# Altium PCB OLED.PcbDoc
Units mm, origin at the board's own origin, x right, y up, seen from the top; angles counter-clockwise.
Board outline 80.01 x 69.34 mm, 2 copper layers (Top Layer, Bottom Layer); 20 components, 10 nets, 62 pads, 4 vias.
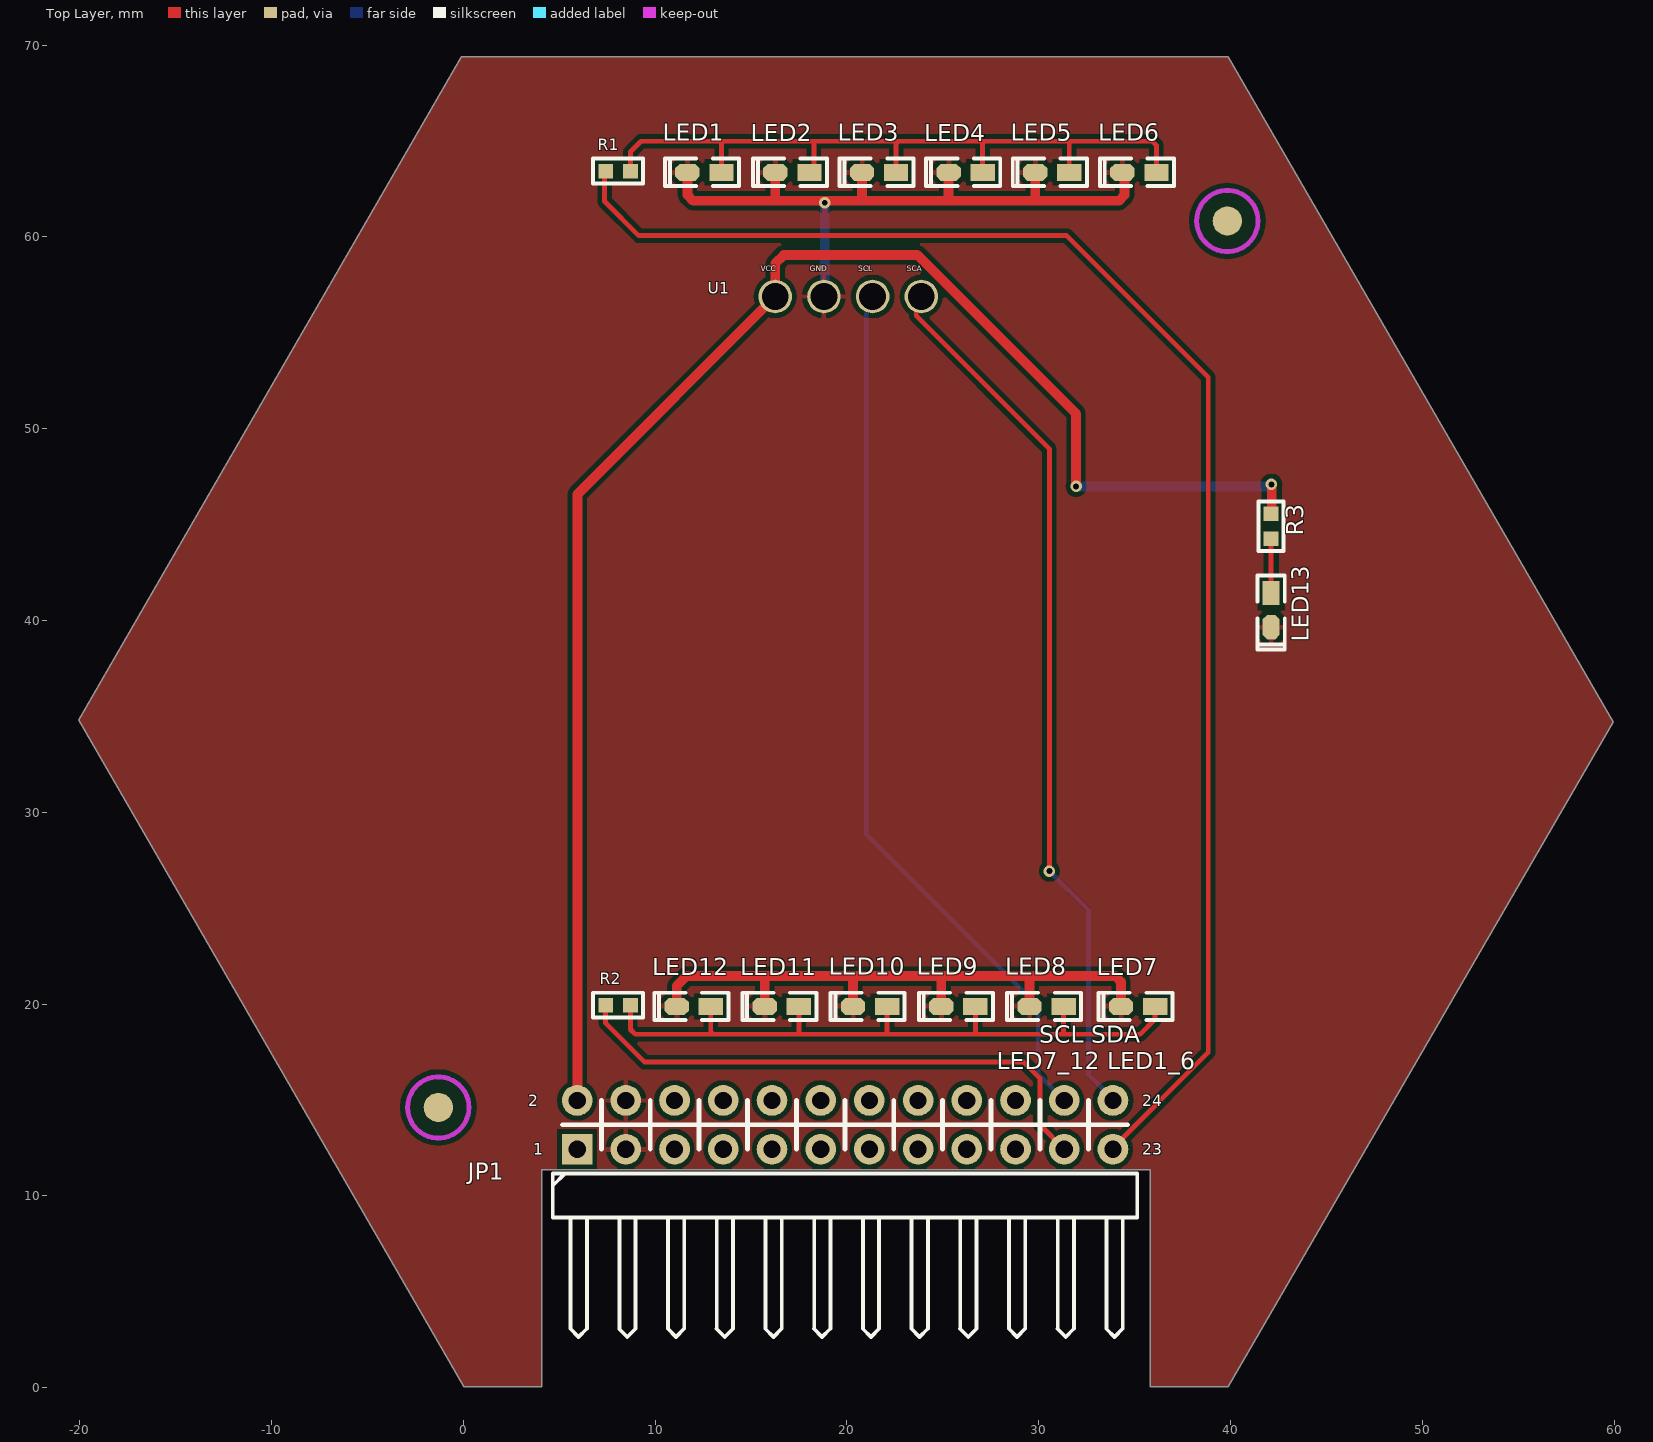
[diagram p0: Top Layer view]
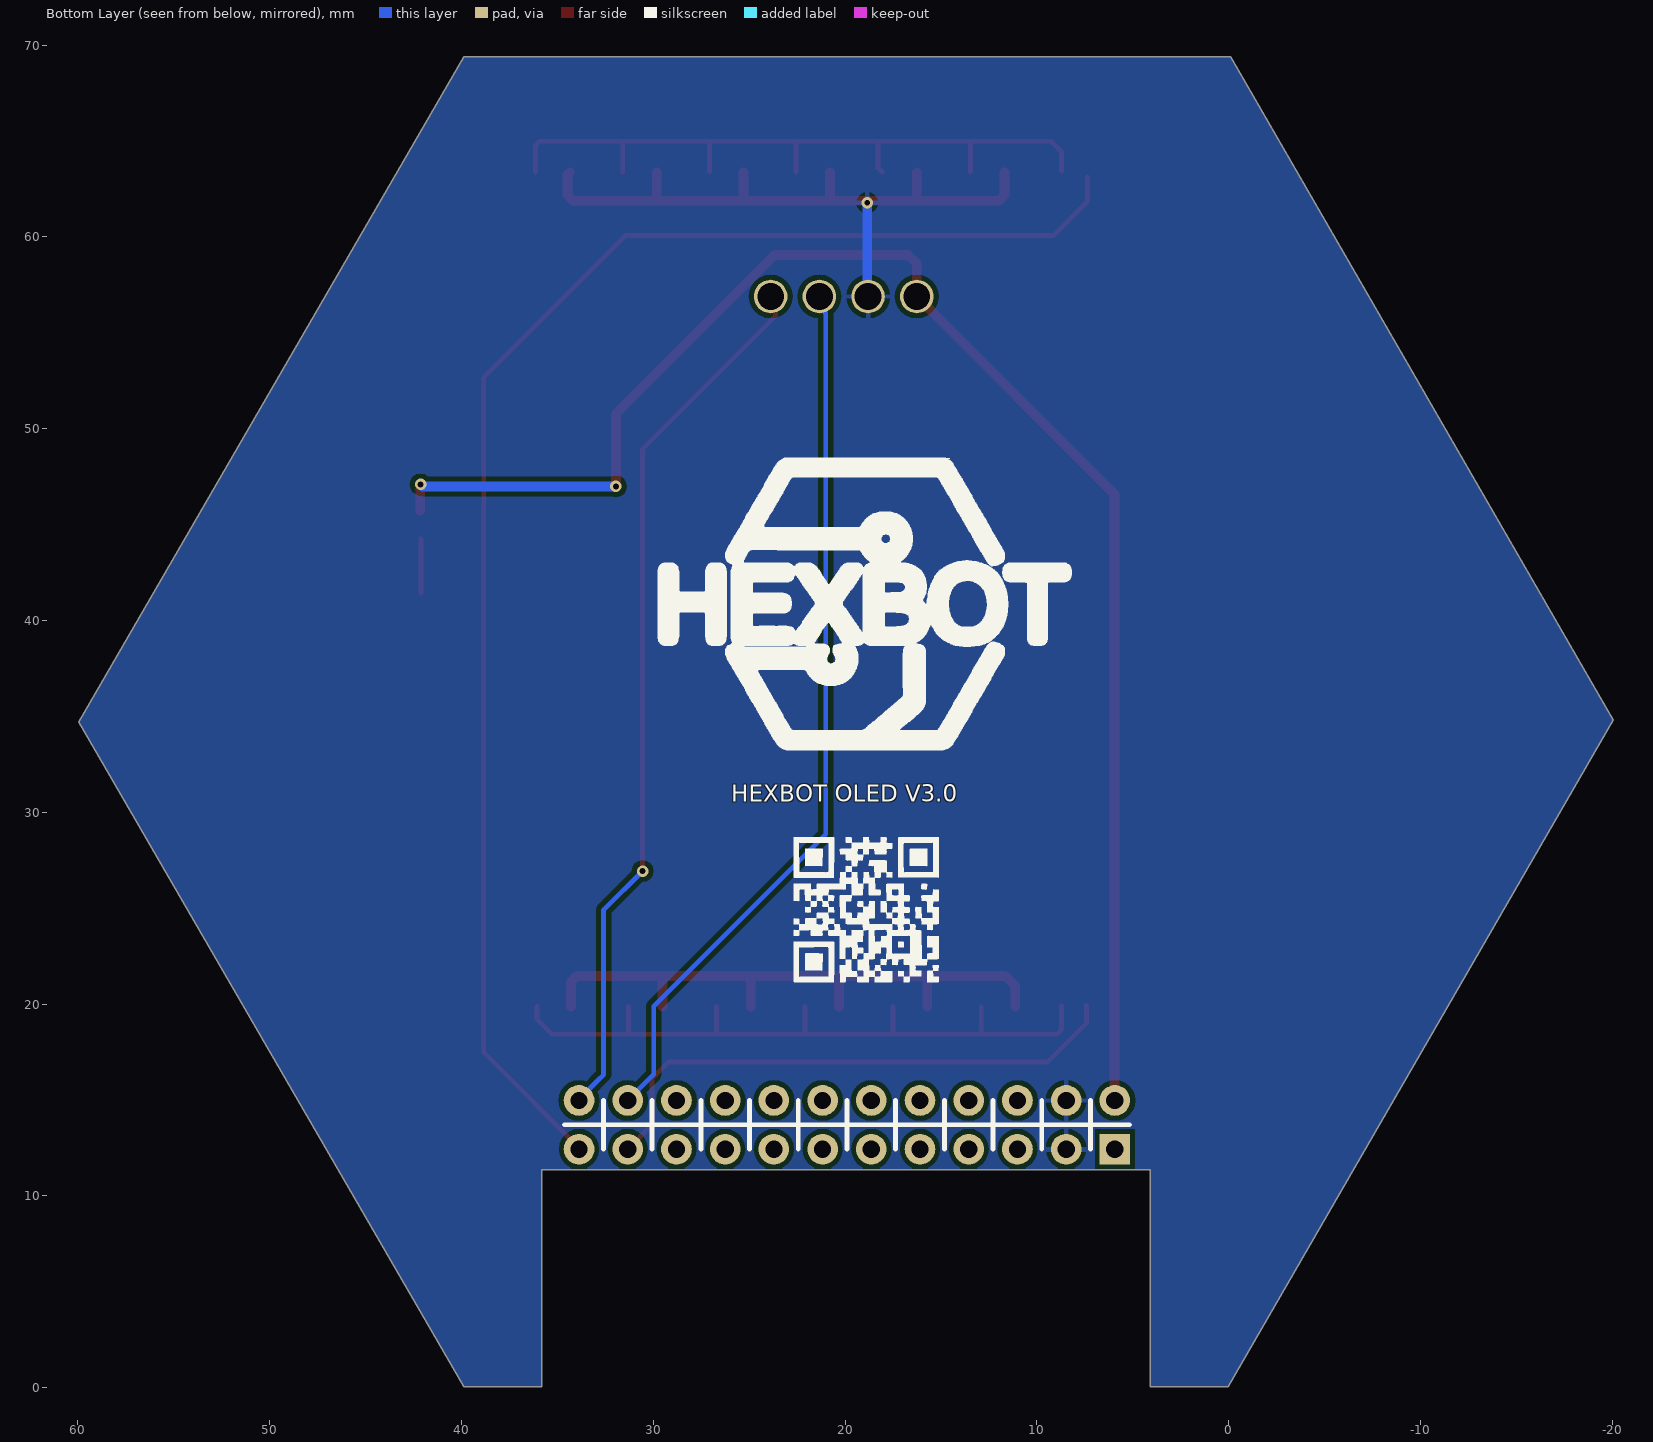
[diagram p1: Bottom Layer view, seen from below]

## Layer stack, top to bottom
Top Solder: solder mask 0.0102, Solder Resist, Dk 3.5
Top Layer: signal copper 0.0356
Dielectric 1: dielectric 0.32, FR-4, Dk 4.8
Bottom Layer: signal copper 0.0356
Bottom Solder: solder mask 0.0102, Solder Resist, Dk 3.5

## Board outline
0.011,0.054 -20.059,34.818 -0.108,69.396 39.889,69.396 59.955,34.715 39.889,0.054 35.825,0.054 35.825,11.348 4.075,11.348 4.075,0.054

## Design rules (kind name [scope] priority, off if disabled: settings)
Clearance [All] p1: gap=0.254 ignorepadtopadclearanceinfootprint=FALSE except(0: Arc-Hole Track-Hole SMDPad-Hole THPad-Hole Via-Hole Fill-Hole Poly-Hole Region-Hole Text-Hole)
ComponentClearance [All] p1: gap=0 collisioncheckmode=3 verticalgap=0.254 showdistances=FALSE
MinimumSolderMaskSliver [All] p1: minsoldermaskwidth=0
PolygonConnect [All] p1: connectstyle=Relief reliefconductorwidth=0.254 reliefentries=4 polygonreliefangle="90 Angle" airgapwidth=0.254
RoutingVias [All] p1: holewidth=0.711 width=1.27 viastyle="Through Hole" minholewidth=0.711 minwidth=1.27 maxholewidth=0.711 maxwidth=1.27
SilkToSilkClearance [All] p1: silktosilkclearance=0
SilkToSolderMaskClearance [IsPad] p1: minsilkscreentomaskgap=0 clearancetoexposedcopper=TRUE
SolderMaskExpansion [All] p1: expansion=0.102 istentingtop=FALSE
Width VCC/GND [InNetClass('New Class')] p1: maxlimit=0.508 minlimit=0.508 preferedwidth=0.508
Width [All] p2: maxlimit=0.508 minlimit=0.254 preferedwidth=0.254
26 further rules are at their usual default settings.

## Classes and differential pairs
component class OLED: JP1 LED1 LED2 LED3 LED4 LED5 LED6 LED7 LED8 LED9 LED10 LED11 LED12 LED13 R1 R2 R3 U1

## Components (designator, comment, footprint, x,y, rotation, side; value= is the part's Value field where it differs from the comment)
JP1 "Header 2X11" HDR2.54-WI-2x12P 19.899,13.703 r0 top
LED1 "红色" "LED 0603R" 12.568,63.378 r180 top
LED2 "红色" "LED 0603R" 17.154,63.378 r180 top
LED3 "红色" "LED 0603R" 21.67,63.378 r180 top
LED4 "红色" "LED 0603R" 26.187,63.378 r180 top
LED5 "红色" "LED 0603R" 30.703,63.378 r180 top
LED6 "红色" "LED 0603R" 35.247,63.378 r180 top
LED7 "红色" "LED 0603R" 35.176,19.884 r180 top
LED8 "红色" "LED 0603R" 30.407,19.884 r180 top
LED9 "红色" "LED 0603R" 25.805,19.884 r180 top
LED10 "红色" "LED 0603R" 21.202,19.884 r180 top
LED11 "红色" "LED 0603R" 16.6,19.884 r180 top
LED12 "红色" "LED 0603R" 12.01,19.884 r180 top
LED13 "红色" "LED 0603R" 42.11,40.545 r270 top
Mark1 "Mark" Mark -1.308,14.609 r90 top
Mark2 "Mark" Mark 39.833,60.834 r90 top
R1 "1K" "R 0603_L" 8.063,63.432 r180 top
R2 "1K" "R 0603_L" 8.063,19.939 r180 top
R3 "1K" "R 0603_L" 42.11,44.915 r90 top
U1 "OLED" 4pinOLED 16.256,56.896 r0 top

## Footprints (in the part's own frame and the unit in brackets; to place one, negate y for a bottom-side part, rotate by r counter-clockwise, add the part's x,y. Pads: shape width x height; smd on the part's side, far side on the other; paste and mask are expansions set on the pad)
4pinOLED [mm]
  round 1.75 hole 1.4: 1(0,-0.001) 2(2.54,0) 3(5.08,0) 4(7.62,0)
HDR2.54-WI-2x12P [mm] "双排弯脚排针，12x2脚  淘宝ID:黄晶宝石   店铺网址:https://shop463601444.taobao.com"
  rect 1.6x1.6 hole 0.9: 1(-13.97,-1.27)
  round 1.6 hole 0.9: 2(-13.97,1.27) 3(-11.43,-1.27) 4(-11.43,1.27) 5(-8.89,-1.27) 6(-8.89,1.27) 7(-6.35,-1.27) 8(-6.35,1.27) 9(-3.81,-1.27) 10(-3.81,1.27) 11(-1.27,-1.27) 12(-1.27,1.27) 13(1.27,-1.27) 14(1.27,1.27) 15(3.81,-1.27) 16(3.81,1.27) 17(6.35,-1.27) 18(6.35,1.27) 19(8.89,-1.27) 20(8.89,1.27) 21(11.43,-1.27) 22(11.43,1.27) 23(13.97,-1.27) 24(13.97,1.27)
  silkscreen extent -15.24,-11.06 15.24,1.27, body extent -15.24,-11.23 15.24,1.62, height 5.1
"LED 0603R" [mil] "红色0603LED                                           淘宝ID:黄晶宝石"
  rect 50x35 smd: 1(-35,0.26)
  oct 50x35 smd: 2(35,0.26)
  silkscreen extent -71,-28 81,28, body extent -31,-16 31,16, height 18
Mark [mil]
  round 60 smd mask+39.37: mark(0,0)
  Top Layer keep-out circle w10: c0,0 r62.99
"R 0603_L" [mil] "1/10W贴片电阻                 淘宝ID:黄晶宝石"
  rect 30x30 smd: 1(-25.59,0) 2(25.59,0)
  silkscreen extent -51,-26 51,26, body extent -31,-16 32,16, height 16

## Part data
JP1: library part "Header 12X2", "12*2P接插件", BOM名称=12*2P接插件, 学习资源=https://shop463601444.taobao.com, 版权归属="封装库来自淘宝卖家 ID：黄晶宝石"
LED1 LED2 LED3 LED4 LED5 LED6 LED7 LED8 LED9 LED10 LED11 LED12 LED13: library part LED-SMD, "贴片LED", BOM名称=贴片LED, 学习资源=https://shop463601444.taobao.com, 版权归属="封装库来自淘宝 ID：黄晶宝石"
R1 R2 R3: library part R, "贴片电阻", BOM名称=贴片电阻, 封装库来自淘宝卖家 ID：黄晶宝石=其他店铺购入均为盗版，不享受售后技术支持服务，请立即申请退款, 版权归属="来自淘宝 ID：黄晶宝石", 联系售后=https://shop463601444.taobao.com

## Via types
v1: diameter 0.6, hole 0.3, Top Layer to Bottom Layer, tented both sides, 4 vias

## Nets (pads, with @x,y where several pads share a name; then routed paths per layer and width w, separated by ;. In a path a pad name is that pad's centre, name@x,y a point inside that pad or via, vN(x,y) a via of type N, cw(c..) or ccw(c..) an arc to the next point about the centre after c; other vN are vias at no path point)
3V3: JP1.1
5V: JP1.2 R3.2 U1.1 | length 82.6
  Top Layer w0.508: JP1.2@5.944,14.973 5.944,46.582 U1.1 16.256,58.612 16.707,59.062 23.665,59.062 31.944,50.784 v1(31.944,46.989) ; v1(42.135,47.096) 42.149,47.082 R3.2@42.149,45.737
  Bottom Layer w0.508: v1(31.944,46.989) 42.028,46.989 v1(42.135,47.096)
GND: JP1.3 JP1.4 LED1.2 LED2.2 LED3.2 LED4.2 LED5.2 LED6.2 LED7.2 LED8.2 LED9.2 LED10.2 LED11.2 LED12.2 LED13.2 U1.2 | length 68.7
  Top Layer w0.508: LED12.2 11.12,20.937 11.641,21.458 15.702,21.458 ; LED1.2 11.679,62.184 11.977,61.886 16.352,61.886 ; LED11.2 15.71,21.449 15.702,21.458 ; LED2.2 16.265,61.972 16.352,61.886 ; LED10.2 20.313,21.37 20.225,21.458 ; LED3.2 20.781,61.941 20.726,61.886 ; LED9.2 24.916,21.368 24.826,21.458 ; LED4.2 25.297,61.95 25.233,61.886 ; LED8.2 29.518,21.347 29.407,21.458 ; LED5.2 29.813,61.909 29.836,61.886 ; LED7.2 34.287,21.16 33.989,21.458 29.407,21.458 ; LED6.2 34.475,63.254 34.475,62.184 34.178,61.886 29.836,61.886 ; 15.702,21.458 20.225,21.458 ; 16.352,61.886 20.726,61.886 ; 20.225,21.458 24.826,21.458 ; 20.726,61.886 25.233,61.886 ; 24.826,21.458 29.407,21.458 ; 25.233,61.886 29.836,61.886
  Bottom Layer w0.508: U1.2 18.838,56.938 v1(18.838,61.785)
LED1_6: JP1.23 R1.2 | length 79.2
  Top Layer w0.254: R1.2@7.363,63.119 7.363,61.849 9.144,60.067 31.452,60.067 38.834,52.685 38.834,17.478 JP1.23@33.536,12.179
LED7_12: JP1.21 R2.2 | length 29
  Top Layer w0.254: R2.2 7.413,19.005 9.447,16.971 29.214,16.971 30.071,16.114 30.071,13.691 JP1.21
NetLED1_1: LED1.1 LED2.1 LED3.1 LED4.1 LED5.1 LED6.1 R1.1 | length 38.5
  Top Layer w0.254: R1.1@8.703,63.433 8.703,64.429 9.26,64.987 13.551,64.987 ; LED1.1 13.457,64.892 13.551,64.987 ; LED2.1 18.274,63.603 18.274,64.987 ; LED3.1 22.559,64.873 22.673,64.987 ; LED4.1 27.075,64.882 27.18,64.987 ; LED5.1 31.591,64.976 31.602,64.987 ; LED6.1 36.136,64.78 35.929,64.987 31.602,64.987 ; 13.551,64.987 18.274,64.987 ; 18.274,64.987 22.673,64.987 ; 22.673,64.987 27.18,64.987 ; 27.18,64.987 31.602,64.987
NetLED7_1: LED7.1 LED8.1 LED9.1 LED10.1 LED11.1 LED12.1 R2.1 | length 37.1
  Top Layer w0.254: R2.1 8.713,18.672 8.96,18.425 13.017,18.425 ; LED12.1 12.898,18.544 13.017,18.425 ; LED11.1 17.488,18.496 17.56,18.425 ; LED10.1 22.091,18.502 22.168,18.425 ; LED9.1 26.694,18.508 26.776,18.425 ; LED8.1 31.296,18.426 ; LED7.1 36.062,19.876 36.062,19.201 35.286,18.425 31.297,18.425 ; 13.017,18.425 17.56,18.425 ; 17.56,18.425 22.168,18.425 ; 22.168,18.425 26.776,18.425 ; 26.776,18.425 31.297,18.425
NetLED13_1: LED13.1 R3.1 | length 2.8
  Top Layer w0.254: R3.1 42.117,44.258 LED13.1
SCL: JP1.22 U1.3 | length 46.3
  Bottom Layer w0.254: U1.3 21.05,56.61 21.05,56.047 21.002,55.999 21.002,28.859 29.97,19.891 29.97,16.332 JP1.22
SDA: JP1.24 U1.4 | length 46.1
  Top Layer w0.254: U1.4 23.614,56.634 23.614,55.89 30.557,48.947 v1(30.557,26.937)
  Bottom Layer w0.254: v1(30.557,26.937) 32.584,24.91 32.584,16.323 32.852,16.055 JP1.24@33.757,15.151
pads on no net: JP1.5 JP1.6 JP1.7 JP1.8 JP1.9 JP1.10 JP1.11 JP1.12 JP1.13 JP1.14 JP1.15 JP1.16 JP1.17 JP1.18 JP1.19 JP1.20 Mark1.mark Mark2.mark

## Polygon pours and split planes (outlines as drawn)
GND on Bottom Layer "Top Layer-No Net1" (solid, pour order 5): 0.011,0.054 -20.059,34.818 -0.108,69.396 39.889,69.396 59.955,34.715 39.889,0.054 35.825,0.054 35.825,11.348 4.075,11.348 4.075,0.054
GND on Top Layer "Top Layer-No Net" (solid, remove dead copper, pour order 4): 0.011,0.054 -20.059,34.818 -0.108,69.396 39.889,69.396 59.955,34.715 39.889,0.054 35.825,0.054 35.825,11.348 4.075,11.348 4.075,0.054

## Silkscreen, mask and mechanical layers (free items; w line width, h text height)
Top Overlay:
  text "SCL SDA" at 30.036,17.681 h1.52
  text "LED7_12 LED1_6" at 27.8,16.289 h1.52
Bottom Overlay:
  drawing of 2418 lines, arcs and shapes, not listed
  text "HEXBOT OLED V3.0" at 25.922,30.26 h1.5
Mechanical 1:
  the board outline again, w0.254

## Text inside footprints (layer, text, board x,y; h text height)
JP1: Top Overlay "1" at 3.643,11.925 h1.02; Top Overlay "2" at 3.389,14.465 h1.02; Top Overlay "23" at 35.393,11.925 h1.02; Top Overlay "24" at 35.393,14.465 h1.02
U1: Top Overlay "SCL" at 20.586,58.101 h0.5; Top Overlay "SCA" at 23.126,58.101 h0.5; Top Overlay "GND" at 18.046,58.101 h0.5; Top Overlay "VCC" at 15.506,58.101 h0.5